# Altium PCB PCB4.PcbDoc
Units mil, origin at the board's own origin, x right, y up, seen from the top; angles counter-clockwise.
Board outline 3866.11 x 3866.11 mil, 2 copper layers (Top Layer, Bottom Layer); 78 components, 62 nets, 338 pads, 112 vias.
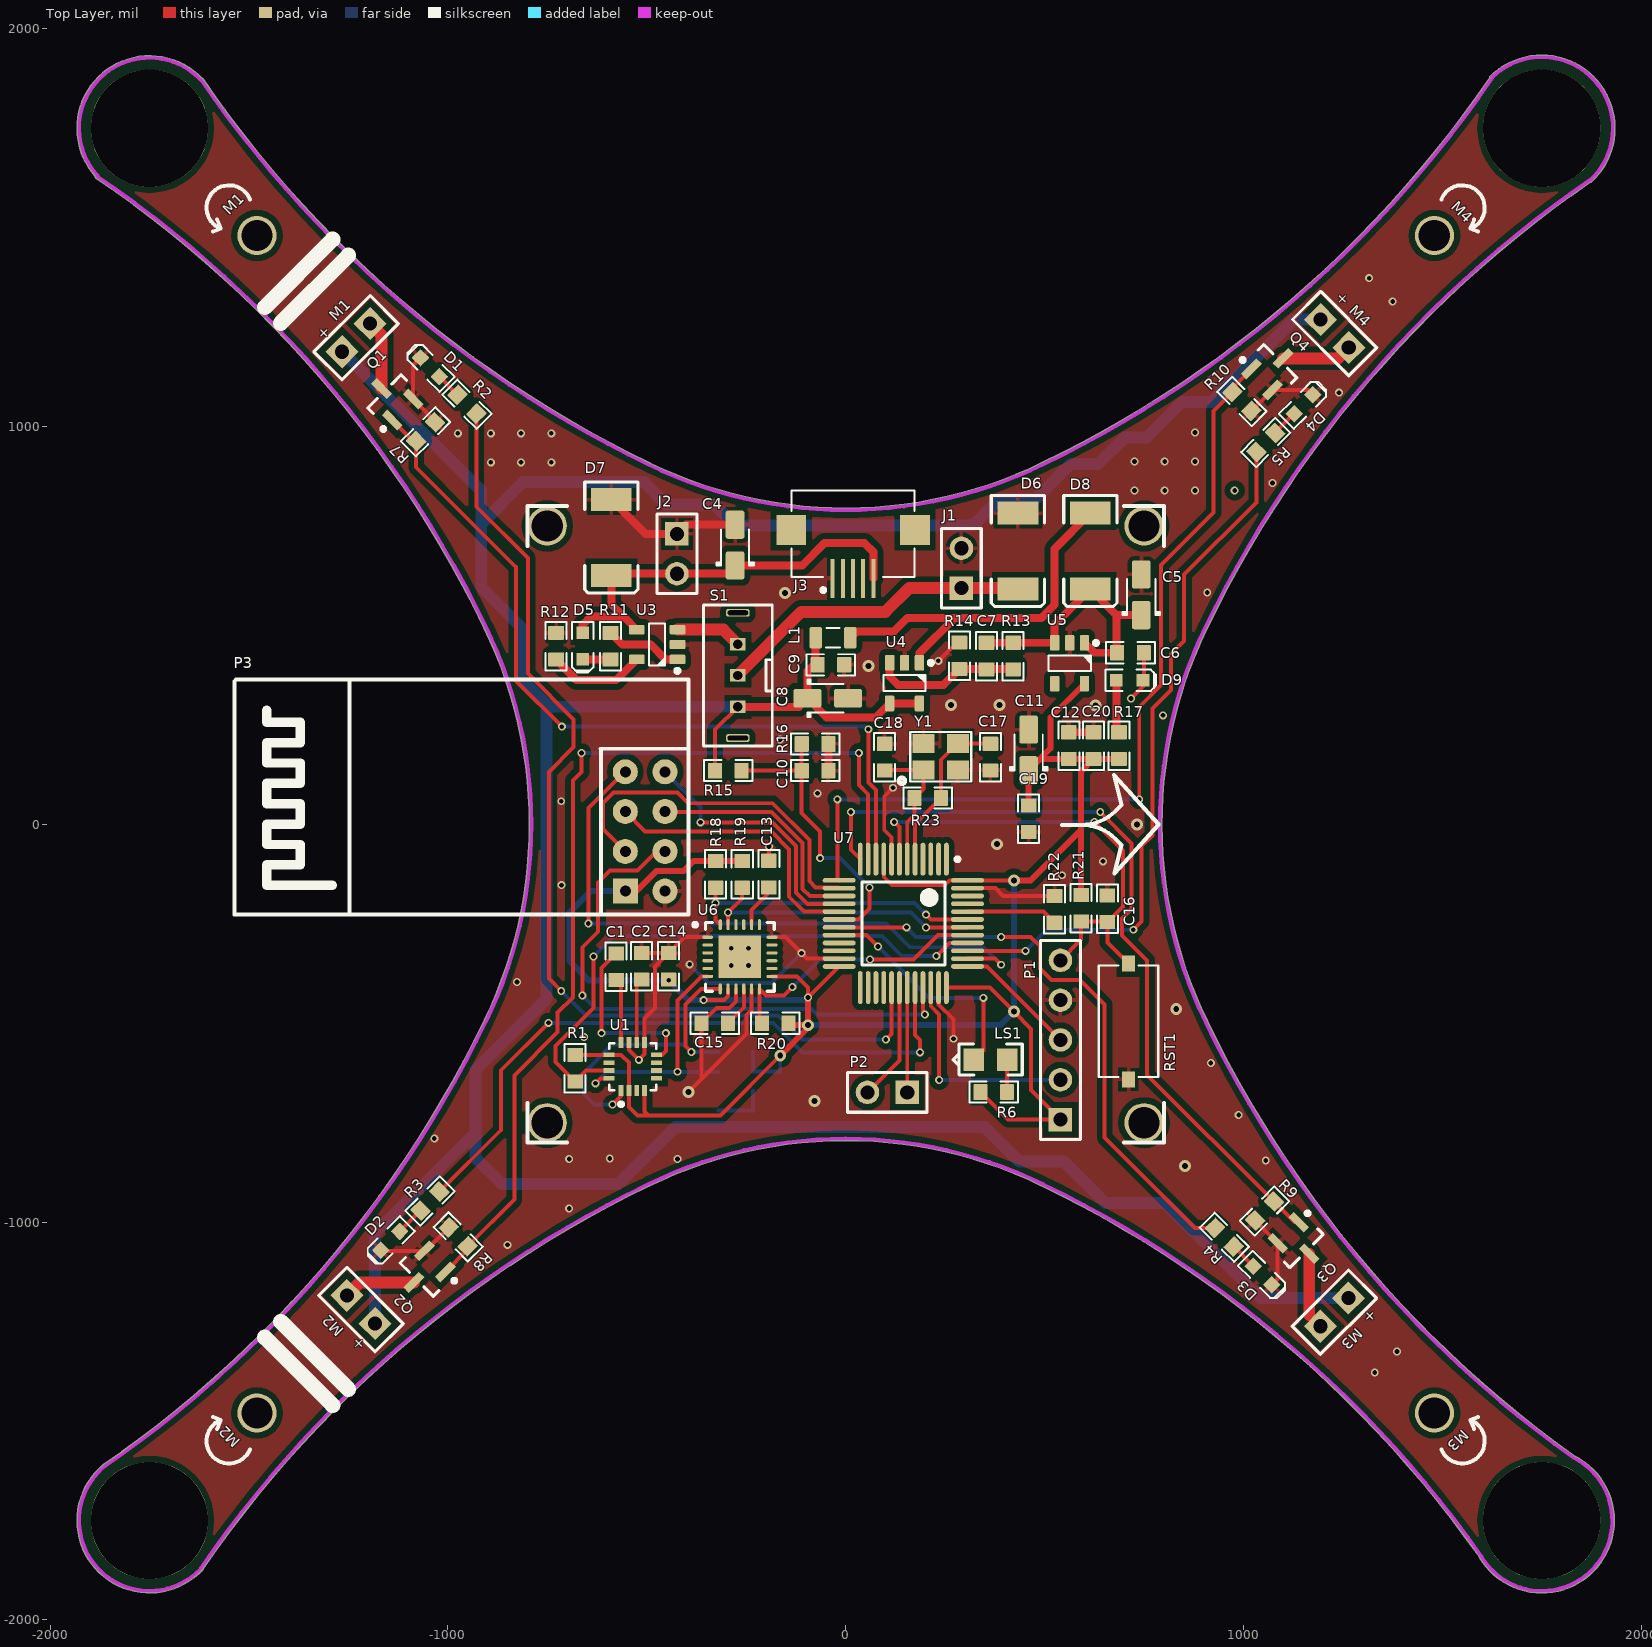
[diagram p0: Top Layer view]
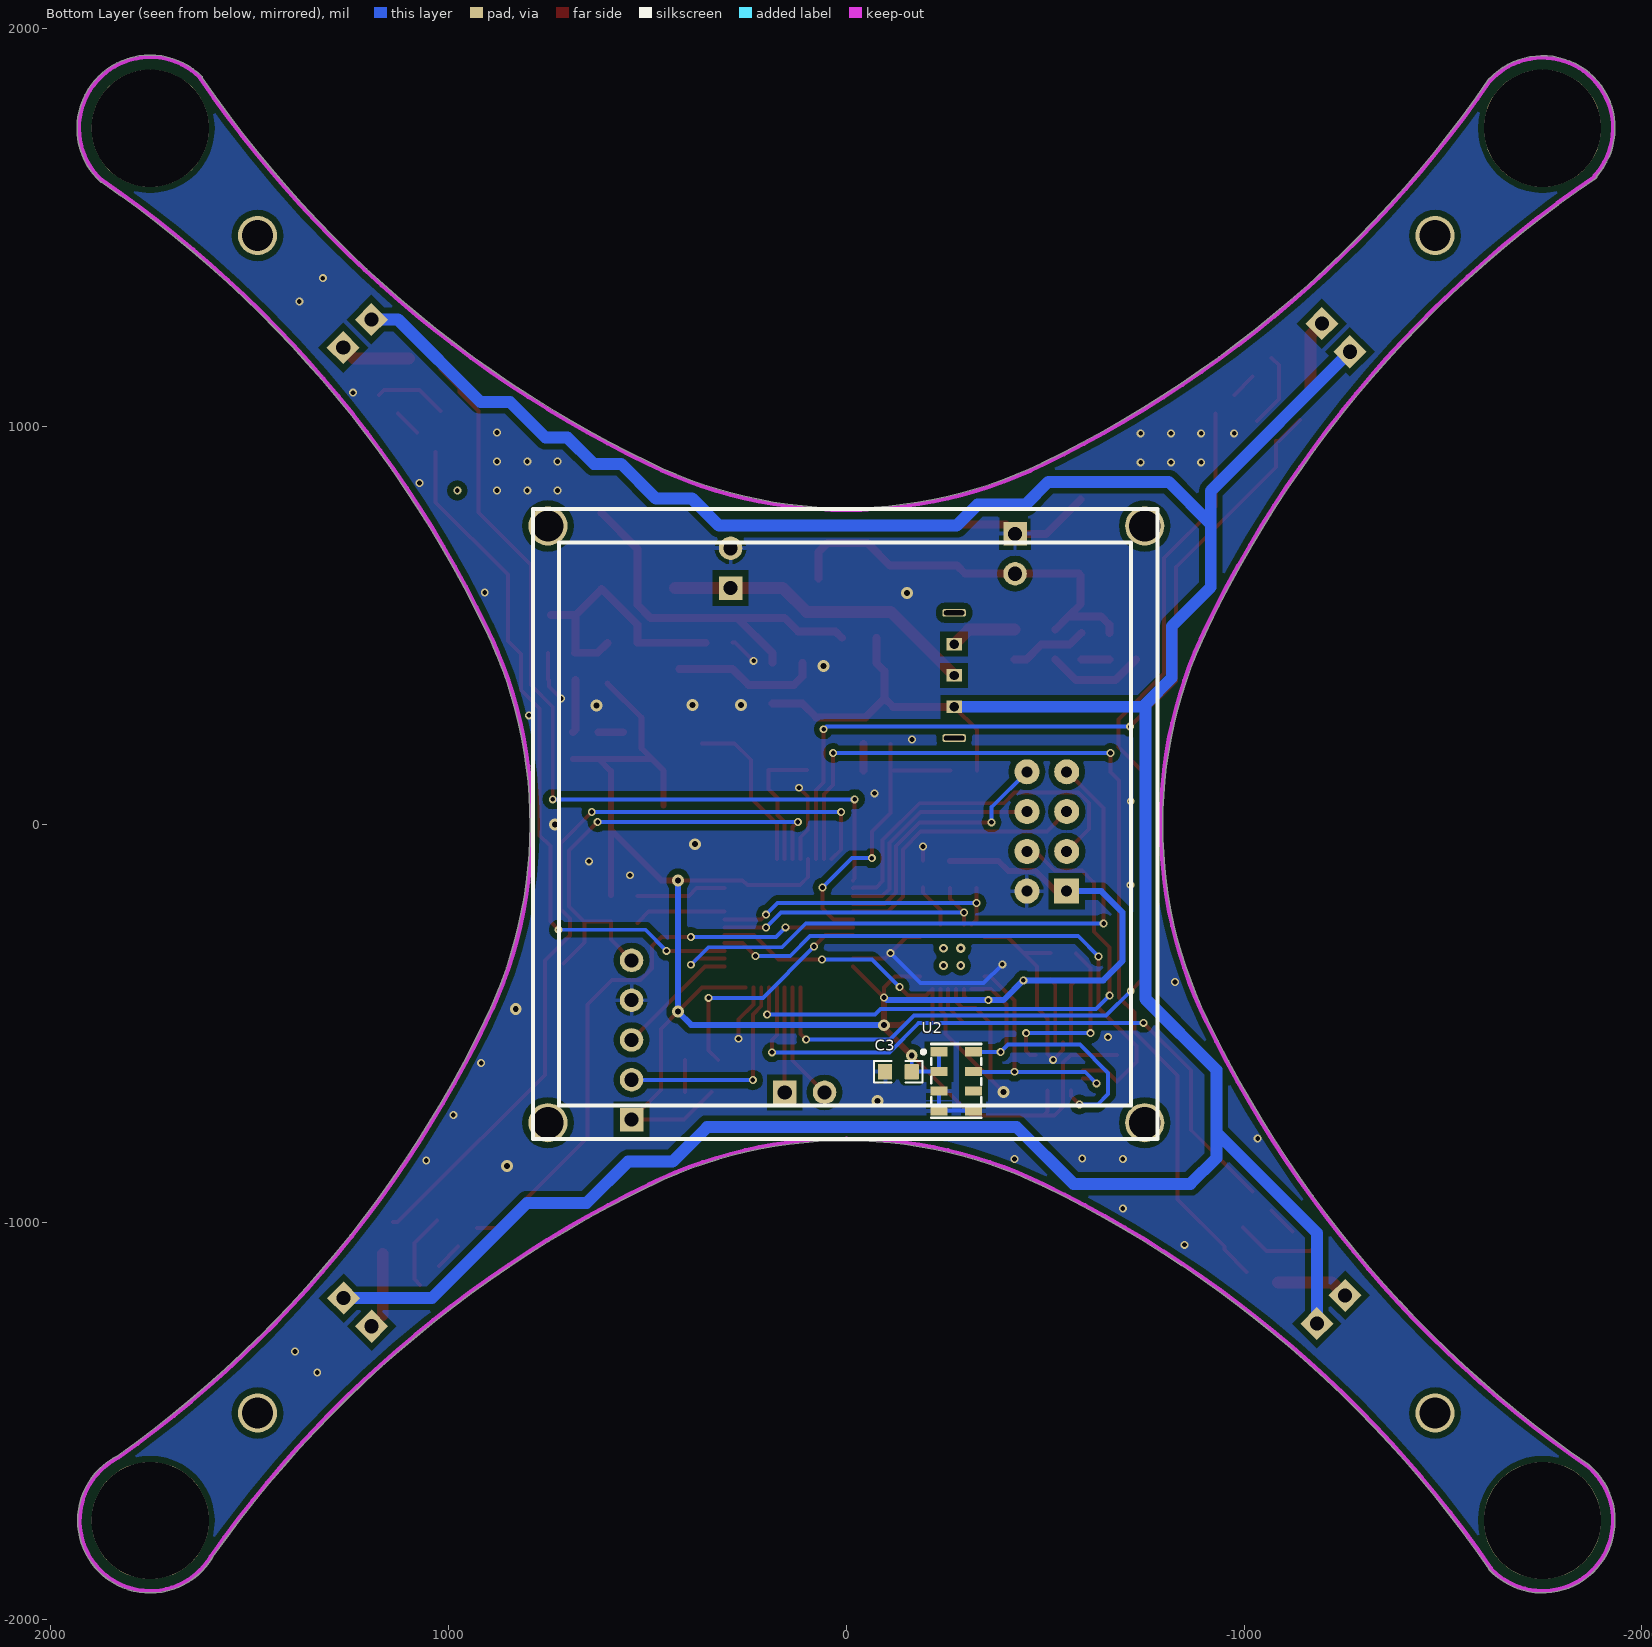
[diagram p1: Bottom Layer view, seen from below]

## Layer stack, top to bottom
Top Layer: signal copper 1.4
Dielectric: dielectric 12.6, FR-4, Dk 4.8
Bottom Layer: signal copper 1.4

## Board outline
-1867.7,-1610.9 ccw(c-1750,-1750) -1616.11,-1873.59 ccw(c-1619.79,-1870.19) -1614.8,-1870.64 cw(c756.29,-3500.97) -495.23,-909.88 ccw(c-497.38,-905.35) -495.17,-909.85 cw(c0,-1920) 491.53,-908.07 ccw(c494.92,-904.38) 492.74,-908.9 cw(c-758.75,-3500) 1593.12,-1842.06 ccw(c1598.05,-1841.17) 1593.75,-1843.75 ccw(c1750,-1750) 1932.22,-1750 ccw(c1750,-1750) 1831.49,-1587.02 ccw(c1829.25,-1591.51) 1830.41,-1586.63 cw(c3500.97,756.29) 909.88,-495.23 ccw(c905.35,-497.38) 909.85,-495.17 cw(c1920,0) 908.07,491.53 ccw(c904.38,494.92) 908.9,492.74 cw(c3500,-758.75) 1871.42,1613.54 ccw(c1871.33,1618.55) 1874.74,1614.87 ccw(c1750,1750) 1933.9,1750 ccw(c1750,1750) 1619.96,1880.04 ccw(c1623.51,1876.49) 1618.51,1876.05 cw(c-756.29,3500.97) 495.23,909.88 ccw(c497.38,905.35) 495.17,909.85 cw(c0,1920) -491.53,908.07 ccw(c-494.92,904.38) -492.74,908.9 cw(c758.75,3500) -1614.97,1873.5 ccw(c-1619.1,1870.66) -1617.93,1875.54 ccw(c-1750,1750) -1886.26,1629.02 ccw(c-1881.32,1628.17) -1884.14,1624.02 cw(c-3500.97,-756.29) -909.88,495.23 ccw(c-905.35,497.38) -909.85,495.17 cw(c-1920,0) -795.02,0 cw(c-1920,0) -908.07,-491.53 ccw(c-904.38,-494.92) -908.9,-492.74 cw(c-3500,758.75) -1866.46,-1610.13 ccw(c-1864.46,-1614.73)

## Design rules (kind name [scope] priority, off if disabled: settings)
Clearance Clearance_1 [InPolygon] p1: gap=15
Clearance [All] p2: gap=7
HoleSize [All] p1: absolutevalues=TRUE maxlimit=300 minlimit=1 maxpercent=80.000 minpercent=20.000
HoleToHoleClearance [All] p1 off: gap=10 allowstackedmicrovias=TRUE
MinimumSolderMaskSliver [All] p1 off: minsoldermaskwidth=10
PolygonConnect PolygonConnect_1 [InNet('GND') vs IsVia] p1: connectstyle=Direct reliefconductorwidth=10 reliefentries=4 polygonreliefangle="90 Angle" airgapwidth=10
PolygonConnect [All] p2: connectstyle=Relief reliefconductorwidth=10 reliefentries=4 polygonreliefangle="90 Angle" airgapwidth=10
RoutingVias [All] p1: holewidth=12 width=20 viastyle="Through Hole" minholewidth=12 minwidth=20 maxholewidth=28 maxwidth=50
SilkToSilkClearance [All] p1 off: silktosilkclearance=10
SilkToSolderMaskClearance [IsPad] p1 off: minsilkscreentomaskgap=10 clearancetoexposedcopper=TRUE
SolderMaskExpansion [All] p1: expansion=4
Width [All] p1: maxlimit=50 minlimit=8 preferedwidth=10
23 further rules are at their usual default settings.

## Classes and differential pairs
component class POWER: C4 C5 C6 C7 C8 C9 C10 C11 C12 D5 D6 D7 D8 D9 J1 J2 J3 L1 R11 R12 R13 R14 R15 R16 R17 S1 U3 U4 U5
component class HMC5883: C1 C2 R1 U1
component class JTAG: P1
component class "LED BELL": D1 D2 D3 D4 LS1 R2 R3 R4 R5 R6
component class MOTORS: M1 M2 M3 M4 Q1 Q2 Q3 Q4 R7 R8 R9 R10
component class MPU6050: C13 C14 C15 R18 R19 R20 U6
component class MS5611: C3 U2
component class NRF24L01: P3
component class STM32F103RC: C16 C17 C18 C19 C20 R21 R22 R23 RST1 U7 Y1
component class UART: P2

## Components (designator, comment, footprint, x,y, rotation, side; value= is the part's Value field where it differs from the comment)
C1 "Cap" CAP_0603 -577,-358 r90 top
C2 "Cap" CAP_0603 -513,-357 r270 top
C3 "Cap" CAP_0603 -131,-622 r180 bottom
C4 "106C" CAP_TAN_A1206 -278,702 r90 top
C5 "106C" CAP_TAN_A1206 743,577 r90 top
C6 "Cap" CAP_0603 716,431.31 r180 top
C7 "Cap" CAP_0603 354,423 r90 top
C8 "106C" CAP_TAN_A1206 -45,317 r0 top
C9 "Cap" CAP_0603 -37,401 r180 top
C10 "Cap" CAP_0603 -77,135 r180 top
C11 "106C" CAP_TAN_A1206 460,187 r90 top
C12 "Cap" CAP_0603 561,198 r270 top
C13 "Cap" CAP_0603 -193,-125 r90 top
C14 "Cap" CAP_0603 -445,-357 r90 top
C15 "Cap" CAP_0603 -329,-500 r0 top
C16 "Cap" CAP_0603 658,-212 r90 top
C17 "Cap" CAP_0603 364,169 r90 top
C18 "Cap" CAP_0603 98,169 r270 top
C19 "Cap" CAP_0603 460,14 r270 top
C20 "Cap" CAP_0603 623,198 r90 top
D1 "LED0" LED_0603_BLUE -1045,1149 r135 top
D2 "LED0" LED_0603_BLUE -1145,-1047 r225 top
D3 "LED0" LED_0603_GREEN 1048,-1134 r315 top
D4 "LED0" LED_0603_GREEN 1151,1056 r45 top
D5 "LED0" LED_0603_RED -661,448 r270 top
D6 "Diode 1N914" SS14 433,687 r270 top
D7 "Diode 1N914" SS14 -589,721 r270 top
D8 "Diode 1N914" SS14 615,687 r270 top
D9 "LED0" LED_0603_RED 714,362.31 r0 top
J1 "Header 2" HDR1X2 291,594 r90 top
J2 "Header 2" HDR1X2 -424,730 r270 top
J3 "USB Micro Type B" USB_MICRO_B 2,878 r90 top
L1 "Inductor" IND_0805 -32,469 r0 top
LS1 "Bell" LED0805 406,-592 r180 top
M1 "Motor" HDR1X2_180_2.54 -1266,1188 r45 top
M2 "Motor" HDR1X2_180_2.54 -1183,-1255 r135 top
M3 "Motor" HDR1X2_180_2.54 1264,-1191 r225 top
M4 "Motor" HDR1X2_180_2.54 1194,1269 r315 top
P1 "Header 5" HDR1X5 540,-742 r90 top
P2 "Header 2" HDR1X2 154.84,-673.84 r180 top
P3 "Header 4X2" "NRF24L01 MODULE" -454,-168 r0 top
Q1 "SI2302" SOT23 -1140,1069 r135 top
Q2 "SI2302" SOT23 -1059,-1125 r225 top
Q3 "SI2302" SOT23 1139,-1053 r315 top
Q4 "SI2302" SOT23 1073,1145 r45 top
R1 "Res1" RES_0603 -680,-613 r270 top
R2 "Res1" RES_0603 -952,1056 r315 top
R3 "Res1" RES_0603 -1045,-947 r45 top
R4 "Res1" RES_0603 952,-1038 r135 top
R5 "Res1" RES_0603 1056,960 r225 top
R6 "Res1" RES_0603 372,-673 r180 top
R7 "Res1" RES_0603 -1056,987 r225 top
R8 "Res1" RES_0603 -974,-1037 r315 top
R9 "Res1" RES_0603 1053,-972 r45 top
R10 "Res1" RES_0603 996,1063 r135 top
R11 "Res Semi" RES_0603 -591,448 r270 top
R12 "Res Semi" RES_0603 -728,448 r90 top
R13 "Res Semi" RES_0603 421,423 r90 top
R14 "Res Semi" RES_0603 286,424 r270 top
R15 "Res Semi" RES_0603 -295,135 r180 top
R16 "Res Semi" RES_0603 -77,202 r180 top
R17 "Res Semi" RES_0603 687,198 r270 top
R18 "Res1" RES_0603 -327,-126 r270 top
R19 "Res1" RES_0603 -260,-126 r270 top
R20 "Res1" RES_0603 -177,-500 r180 top
R21 "Res1" RES_0603 592,-211 r90 top
R22 "Res1" RES_0603 525,-214 r270 top
R23 "Res1" RES_0603 206,66 r0 top
RST1 "SW-PB" KEY 711,-350 r270 top
S1 "SW-SPDT" SW_SPDT1X3_180_xx -271,453 r270 top
U1 "HMC5883" HMC5883 -535,-609 r90 top
U2 "MS5611" MS5611 -233,-572 r180 bottom
U3 "LTC4054" SOT23-5 -474,452 r180 top
U4 "LM27313" SOT23-5 148,355 r270 top
U5 "MIC5205-3.3" SOT23-5 563,405 r270 top
U6 "MPU6050" MPU60X0_QFN24 -266,-333 r0 top
U7 "STM32F103C8T6" TQFP_48 145,-249 r270 top
Y1 "OSCILLATOR" 3225 239,170 r0 top

## Footprints (in the part's own frame and the unit in brackets; to place one, negate y for a bottom-side part, rotate by r counter-clockwise, add the part's x,y. Pads: shape width x height; smd on the part's side, far side on the other; paste and mask are expansions set on the pad)
3225 [mm]
  rect 1.4x1.2 smd: 1(-1.1,-0.85) 2(1.1,-0.85) 3(1.1,0.85) 4(-1.1,0.85)
  silkscreen extent -2.66,-1.72 1.95,1.58, body extent -1.33,-1.05 1.27,1.05, height 0.55
CAP_0603 [mm] "Chip Capacitor, Body 1.6x0.8mm, 0603, IPC Medium Density"
  round 0.254 on Mech14: 0(0,0)
  rrect10% 0.9x1 smd: 1(-0.85,0) 2(0.85,0)
  Top Layer pour cut-out: -0.5,0.5 0.5,0.5 0.5,-0.5 -0.5,-0.5
  silkscreen extent -1.55,-0.67 1.55,0.67, body extent -0.85,-0.45 0.85,0.45, height 0.89
CAP_TAN_A1206 [mm] "Capacitor, polarized, Molded Body, EIA 535BAAC size A; 3.20mm L X 1.60mm W X 1.80mm H"
  round 0.508 on Mech14: 0(0,0)
  rrect25% 1.8x1.2 smd: 1(-1.3,0) 2(1.3,0)
  silkscreen extent -1.3,-1.2 1,1.2, body extent -1.6,-0.8 1.6,0.8, height 1.8
HDR1X2 [mm] "Connector; Header; 2 Position"
  rect 1.5x1.5 hole 0.9: 1(0,0)
  round 1.5 hole 0.9: 2(2.54,0)
  silkscreen extent -1.27,-1.27 3.81,1.27
HDR1X2_180_2.54 [mm] "Connector; Header; 2 Position"
  rect 1.5x1.5 hole 0.9: 1(0,0) 2(2.54,0)
  silkscreen extent -1.27,-1.27 3.81,1.27, body extent -1.27,-1.27 3.81,1.27, height 7.58
HDR1X5 [mm] "Connector; Header; 5 Position"
  rect 1.5x1.5 hole 0.9: 1(0,0)
  round 1.5 hole 0.9: 2(2.54,0) 3(5.08,0) 4(7.62,0) 5(10.16,0)
  silkscreen extent -1.27,-1.27 11.43,1.27
HMC5883 [mm]
  rect 0.7x0.3 smd: 1(-1.525,0.75) 2(-1.525,0.25) 3(-1.525,-0.25) 4(-1.525,-0.75) 9(1.525,-0.75) 10(1.525,-0.25) 11(1.525,0.25) 12(1.525,0.75)
  rect 0.3x0.7 smd: 5(-0.75,-1.525) 6(-0.25,-1.525) 7(0.25,-1.525) 8(0.75,-1.525) 13(0.75,1.525) 14(0.25,1.525) 15(-0.25,1.525) 16(-0.75,1.525)
  silkscreen extent -2.52,-1.5 1.5,1.5, body extent -1.5,-1.5 1.5,1.5, height 0.8
IND_0805 [mm] "Ferrite Bead Chip, Body 2.0x1.2mm, 0805, IPC Medium Density"
  round 0.508 on Mech14: 0(0,0)
  rrect25% 0.8x1.35 smd: 1(-1.1,0) 2(1.1,0)
  silkscreen extent -0.43,-0.64 0.46,0.64, body extent -1,-0.62 1,0.63, height 0.9
KEY [mm]
  rect 1x0.8 smd: 1(0,0) 2(7.4,0)
  silkscreen extent 0.13,-1.91 7.24,1.91, body extent -0.32,-1.73 7.68,1.77, height 8.02
LED0805 [mil]
  rect 52x56 smd: 1(0,0) 2(84,0)
  silkscreen extent -38,-40 136,38
LED_0603_BLUE [mm] "Chip Capacitor, 2-Leads, Body 1.6x0.8mm, IPC Medium Density"
  round 0.254 on Mech14: 0(0,0)
  rrect10% 0.8x0.8 smd: 1(-0.85,0) 2(0.85,0)
  Top Layer pour cut-out: -0.5,0.5 0.5,0.5 0.5,-0.5 -0.5,-0.5
  silkscreen extent -1.55,-0.68 1.68,0.68, body extent -0.8,-0.4 0.8,0.4, height 0.75
LED_0603_GREEN [mm] "Chip Capacitor, 2-Leads, Body 1.6x0.8mm, IPC Medium Density"
  rect 0.8x0.8 smd: 1(-0.85,0) 2(0.85,0)
  Top Layer pour cut-out: -0.5,0.5 0.5,0.5 0.5,-0.5 -0.5,-0.5
  silkscreen extent -1.55,-0.68 1.68,0.68, body extent -0.8,-0.4 0.8,0.4, height 0.75
LED_0603_RED [mm] "Chip Capacitor, 2-Leads, Body 1.6x0.8mm, IPC Medium Density"
  rect 0.8x0.8 smd: 1(-0.85,0) 2(0.85,0)
  Top Layer pour cut-out: -0.5,0.5 0.5,0.5 0.5,-0.5 -0.5,-0.5
  silkscreen extent -1.55,-0.67 1.68,0.67, body extent -0.8,-0.4 0.8,0.4, height 0.75
MPU60X0_QFN24 [mm] "QFN, 24-Leads, Body 4.00x4.00mm, Pitch 0.50mm, Thermal Pad 2.70x2.70mm, IPC Medium Density"
  oval 0.7x0.2 smd: 1(-2.05,1.25) 2(-2.05,0.75) 3(-2.05,0.25) 4(-2.05,-0.25) 5(-2.05,-0.75) 6(-2.05,-1.25) 13(2.05,-1.25) 14(2.05,-0.75) 15(2.05,-0.25) 16(2.05,0.25) 17(2.05,0.75) 18(2.05,1.25)
  oval 0.2x0.7 smd: 7(-1.25,-2.05) 8(-0.75,-2.05) 9(-0.25,-2.05) 10(0.25,-2.05) 11(0.75,-2.05) 12(1.25,-2.05) 19(1.25,2.05) 20(0.75,2.05) 21(0.25,2.05) 22(-0.25,2.05) 23(-0.75,2.05) 24(-1.25,2.05)
  rect 2.7x2.7 smd: 25(0,0)
  silkscreen extent -2.97,-2.2 2.2,2.2, body extent -2.05,-2.05 2.05,2.05, height 0.9
MS5611 [mm]
  rect 1.1x0.6 smd: 1(0,0) 2(0,-1.25) 3(0,-2.5) 4(0,-3.75) 5(2.2,-3.75) 6(2.2,-2.5) 7(2.2,-1.25) 8(2.2,0)
  silkscreen extent -1.1,-4.2 2.7,0.5
"NRF24L01 MODULE" [mm] "NRF24L01_MODE"
  round 1.6 hole 0.7: 1(0,0) 3(0,2.54) 4(-2.54,2.54) 5(0,5.08) 6(-2.54,5.08) 7(0,7.62) 8(-2.54,7.62)
  rect 1.6x1.6 hole 0.7: 2(-2.54,0)
  silkscreen extent -27.5,-1.5 1.5,13.5
RES_0603 [mm]
  round 0.254 on Mech14: 0(0,0)
  rrect10% 0.9x1 smd: 1(-0.85,0) 2(0.85,0)
  Top Layer pour cut-out: -0.5,0.5 0.5,0.5 0.5,-0.5 -0.5,-0.5
  silkscreen extent -1.55,-0.67 1.55,0.67, body extent -0.87,-0.47 0.88,0.48, height 0.54
SOT23 [mm] "SOT23, 3-Leads, Body 3.0x2.5mm (max), Pitch 0.95mm, IPC Medium Density"
  rect 1.4x0.5 smd: 1(-0.95,0.95) 2(-0.95,-0.95) 3(0.95,0)
  silkscreen extent -1.07,-1.5 0.7,1.87, body extent -1.4,-1.45 1.4,1.45, height 1.29
SOT23-5 [mm]
  round 0.5 on Mech14: 0(0,0)
  rrect25% 1x0.6 smd: 1(-1.3,0.95) 2(-1.3,0) 3(-1.3,-0.95) 4(1.3,-0.95) 5(1.3,0.95)
  silkscreen extent -1.42,-1.35 0.51,1.81, body extent -1.4,-1.45 1.4,1.45, height 1.44
SS14 [mm] "SS14,M7,TVS"
  rect 1.45x2.6 smd: 1(-2.425,0) 2(2.425,0)
  silkscreen extent -3.55,-1.7 3.55,1.7, body extent -2.8,-1.97 2.8,1.98, height 2.62
SW_SPDT1X3_180_xx [mm] "TE Connectivity SLS121PC04 SPDT slider"
  rect 0.8x1 hole 0.6: 1(0,0) 2(2,0) 3(4,0)
  rrect50% 0.5x1.5 hole 0.3 slot 1.3 at 90 deg: ""(-2,0) ""(6,0)
  silkscreen extent -2.5,-2.2 6.5,2.2, body extent -2.3,-2.15 6.3,2.15, height 8
TQFP_48 [mm] "Thin QFP, 48-Leads, Body 7x7mm, Pitch 0.5mm, IPC Low Density"
  oval 2.1x0.3 smd: 1(-4.1,2.75) 2(-4.1,2.25) 3(-4.1,1.75) 4(-4.1,1.25) 5(-4.1,0.75) 6(-4.1,0.25) 7(-4.1,-0.25) 8(-4.1,-0.75) 9(-4.1,-1.25) 10(-4.1,-1.75) 11(-4.1,-2.25) 12(-4.1,-2.75) 25(4.1,-2.75) 26(4.1,-2.25) 27(4.1,-1.75) 28(4.1,-1.25) 29(4.1,-0.75) 30(4.1,-0.25) 31(4.1,0.25) 32(4.1,0.75) 33(4.1,1.25) 34(4.1,1.75) 35(4.1,2.25) 36(4.1,2.75)
  oval 0.3x2.1 smd: 13(-2.75,-4.1) 14(-2.25,-4.1) 15(-1.75,-4.1) 16(-1.25,-4.1) 17(-0.75,-4.1) 18(-0.25,-4.1) 19(0.25,-4.1) 20(0.75,-4.1) 21(1.25,-4.1) 22(1.75,-4.1) 23(2.25,-4.1) 24(2.75,-4.1) 37(2.75,4.1) 38(2.25,4.1) 39(1.75,4.1) 40(1.25,4.1) 41(0.75,4.1) 42(0.25,4.1) 43(-0.25,4.1) 44(-0.75,4.1) 45(-1.25,4.1) 46(-1.75,4.1) 47(-2.25,4.1) 48(-2.75,4.1)
  silkscreen extent -4.22,-2.65 2.65,3.57, body extent -4.5,-4.5 4.5,4.5, height 1.2
USB_MICRO_B [mm] "Connector; USB2.0, Type A, SM; 5 Position; Right Angle"
  rect 2.5x0.25 smd: 1(-6.6,-1.719) 2(-6.6,-1.069) 3(-6.6,-0.419) 4(-6.6,0.231) 5(-6.6,0.881)
  rect 1.9x1.9 smd: ""(-3.505,-4.369) ""(-3.505,3.531)
  silkscreen extent -7.47,-4.36 -1,3.52, body extent -6.36,-4.42 -0.93,3.56, height 2.71

## Part data
C1 C2 C3 C6 C7 C9 C10 C12 C13 C14 C15 C16 C17 C18 C19 C20: "Capacitor"
C4 C5 C8 C11: library part "Cap Pol2", "Polarized Capacitor (Axial)"
D1 D2 D3 D4 D5 D9: "Typical INFRARED GaAs LED"
D6 D7 D8: "High Conductance Fast Diode"
J1 J2 P2: "Header, 2-Pin"
J3: library part USB_Micro_TypeB, "Connector SMD USB Micro Type B middle mount"
LS1: "Electrical Bell"
P1: "Header, 5-Pin"
P3: "Header, 4-Pin, Dual row"
Q1 Q2 Q3 Q4: "N-Channel MOSFET"
R1 R2 R3 R4 R5 R6 R7 R8 R9 R10 R18 R19 R20 R21 R22 R23: "Resistor"
R11 R12 R13 R14 R15 R16 R17: "Semiconductor Resistor"
RST1: "Switch"
S1: "SPDT Subminiature Toggle Switch, Right Angle Mounting, Vertical Actuation"

## Free pads (board coordinates)
  round 295.28 hole 295.28: ""(-1750,-1750) ""(-1750,1750) ""(1750,-1750) ""(1750,1750)
  round 98.43 hole 78.74: ""(-1480,-1480) ""(-1480,1480) ""(-750,-750) ""(-750,750) ""(750,-750) ""(750,750) ""(1480,-1480) ""(1480,1480)

## Via types
v1: diameter 20, hole 12, Top Layer to Bottom Layer, 93 vias
v2: diameter 30, hole 15, Top Layer to Bottom Layer, 15 vias
v3: diameter 22, hole 12, Top Layer to Bottom Layer, 3 vias
v4: diameter 23.62, hole 11.81, Top Layer to Bottom Layer, 1 vias

## Nets (pads, with @x,y where several pads share a name; then routed paths per layer and width w, separated by ;. In a path a pad name is that pad's centre, name@x,y a point inside that pad or via, vN(x,y) a via of type N, cw(c..) or ccw(c..) an arc to the next point about the centre after c; other vN are vias at no path point)
3V3: C3.2 C11.1 C12.2 C14.1 C19.1 C20.1 P1.1 P3.2 R1.1 R6.2 R17.2 R18.1 R19.1 R20.1 R21.2 U1.2 U1.4 U1.13 U2.1 U2.2 U5.5 U6.8 U6.13 U7.9 U7.24 U7.36 U7.48 | length 5850.3
  Top Layer w10: R1.1@-679.94,-579.47 U1.13 -564.53,-579.47 -544.84,-599.16 U1.2 -544.84,-710.16 -523,-732 -495,-732 ; U1.4 -505.47,-721.53 -495,-732 ; v1(-357,-442) -305.53,-442 -295.53,-432 U6.8 ; U6.13 -122.79,-382.21 -95,-410 v1(-95,-435) ; v2(-164.46,-581.54) -314.93,-732 -495,-732 ; v1@-95,-435.85 U7.24 ; U7.9 95.79,-131.79 117,-153 248.61,-153 260.87,-140.73 U7.48 v2(423,-140.73) ; U7.36 362.42,-410.42 v2(423,-471) 466,-514 466,-668 P1.1 407.54,-742 R6.2
  Top Layer w15: P3.2 -526,-168 -475,-117 -407,-117 -382.54,-92.54 R18.1 R19.1 ; v2(-164.46,-581.54) -95,-512.07 v2(-95,-505) ; R20.1 -138.54,-505 v2(-95,-505) ; v1@-95,-435.85 v2(-95,-505) ; v2(423,-140.73) 465.27,-140.73 592,-14 ; C19.1 C11.1 515,190.82 515,268.42 U5.5 ; 489.65,164.54 C12.2 C20.1 ; R21.2 592,-14 ; R17.2 C20.1 ; 592,-14 592,133.54 C20.1
  Bottom Layer w10: U2.1 U2.2 C3.2@-165.25,-621.21 ; C3.2 v2(-164.46,-581.54)
  Bottom Layer w15: P3.2 -641,-168 -694,-221 -694,-344 -646,-392 v1(-445,-392) -395,-442 v1(-357,-442) v1@-102,-442 ; v2@-95,-504 390,-504 v2(423,-471) v2(423,-140.73)
3V7: C8.1 C9.2 L1.1 M1.1 M2.1 M3.1 M4.1 R15.2 S1.3 U4.4 U4.5 | length 9090.8
  Top Layer w10: R15.2 -328.46,238.06 S1.3
  Top Layer w20: S1.3 -117.66,295.52 C8.1 ; L1.1 -75.31,405.84 -96.18,384.97 C8.1 ; U4.5 U4.4 75.78,269 -48.18,269 C8.1
  Bottom Layer w30: M1.1 -916,838 -916,755 ; M2.1 -1183,-1027 -930,-774 ; -745.52,295.52 S1.3 ; M4.1 1127,1269 920,1062 846,1062 756,972 701,972 635,906 566,906 479,819 388,819 320,751 -277,751 -330,804 -451,804 -508,861 -810,861 -916,755 ; M3.1 1042,-1191 802.61,-951.61 652.61,-951.61 548.54,-847.54 436.54,-847.54 350,-761 -428,-761 -571,-904 -865,-904 -930,-839 -930,-774 ; -930,-774 -930,-617 -752,-439 -752,302 -818,368 -818,498 -916,596 -916,755
5V: C5.1 C6.2 C7.2 D8.2 R13.2 U5.1 U5.3 | length 683.9
  Top Layer w20: C7.2 R13.2 525.31,456.46 525.31,501.84 D8.2 680.71,525.82 ; U5.1 625.27,431.31 C6.2 ; C6.2@680.71,433.14 680.71,525.82 ; C5.1 680.71,525.82
AUX_I2C.SCL: U1.1 U2.8 U6.7 | length 784.2
  Top Layer w10: v1(-586,-704) -564.53,-682.53 U1.1 ; v1(-388,-572) -403,-557 -403,-453 -363.71,-413.71 U6.7
  Bottom Layer w10: v1(-586,-704) -632,-704 -658,-678 -658,-625 -587,-554 -406,-554 v1(-388,-572) U2.8
AUX_I2C.SDA: U1.16 U2.7 U6.6 | length 640.2
  Top Layer w10: v1(-629,-651) -616.53,-638.53 U1.16 ; v1(-423,-622) -423,-443 -362.21,-382.21 U6.6
  Bottom Layer w10: v1(-629,-651) -600,-622 v1(-423,-622) U2.7@-320.4,-622
BAT_CHECK: C10.2 R15.1 R16.2 U7.18 | length 752
  Top Layer w10: R15.1 C10.2 ; R16.2 C10.2 ; v1(-64,-85) -64,-18 -110.46,28.46 C10.2 ; U7.18 31.84,-239.16 60,-211 v1(60,-159)
  Bottom Layer w10: v1(-64,-85) -14,-85 v1(60,-159)
CHARGE_5V: C4.1 D5.1 D7.2 J2.2 J3.1 U3.4 | length 1062
  Top Layer w20: D5.1 -661,502 -640,523 -558.78,523 ; U3.4 -558.78,523 ; J3.1 69.67,684.33 47,707 -53,707 -109.18,650.82 C4.1 -298.82,630 J2.2 -584.53,630 D7.2 -589,553.22 -558.78,523
GND: C2.1 C3.1 C4.2 C5.2 C6.1 C8.2 C9.1 C10.1 C11.2 C12.1 C13.2 C14.2 C15.1 C16.2 C17.1 C18.1 C19.2 C20.2 D1.2 D2.2 D3.2 D4.2 D6.1 D7.1 D9.2 J1.2 J2.1 J3.5 P1.4 P3.1 Q1.2 Q2.2 Q3.2 Q4.2 R7.1 R8.1 R9.1 R10.1 R12.2 R14.1 R16.1 R22.1 RST1.2 U1.9 U1.11 U2.3 U2.4 U2.5 U3.2 U4.2 U5.2 U6.1 U6.9 U6.11 U6.18 U7.8 U7.23 U7.35 U7.47 Y1.2 Y1.4 | length 3844.7
  Top Layer w10: D2.2 -1167.22,-1072.11 Q2.2 -1056.43,-1072.11 R8.1 ; D1.2 -1087.11,1154.22 Q1.2 R7.1@-1032.34,1014.23 ; U1.11 -544.84,-567.16 v1(-520,-592) -505.47,-577.47 U1.9 -505.47,-488.47 -479,-462 -479,-357.54 C14.2 ; C2.1 C14.2 ; v2(-395,-673) -362.46,-640.46 ; U6.1 -405.25,-283.79 C14.2 ; U6.9 -275.84,-445.84 -292,-462 -324.46,-462 C15.1 -362.46,-640.46 ; U6.11 -236.47,-466.47 -249,-479 -249,-527 -362.46,-640.46 ; C13.2 v1(-193,-56) ; U6.18 -151.21,-283.79 v1(-111,-324) -97.42,-337.58 U7.23 ; U7.8 115.47,-32.47 97,-14 97,70 v1(119,92) ; v1(233,411) 279.46,457.46 R14.1 ; U7.35 233.58,-452.54 271,-489.96 v1(271,-539) ; U7.47 376.42,-160.42 396,-180 R22.1@524.46,-180 ; v1(717,316) 747.46,346.46 D9.2 ; D9.2@749.46,364.31 C6.1 ; R10.1 1020.23,1039.34 Q4.2 1162.22,1092.11 D4.2 ; R9.1 1029.34,-996.23 Q3.2 1086.11,-1143.22 D3.2
  Top Layer w20: D7.1 -502.53,730 J2.1 -400.82,753.18 C4.2 ; C10.1 R16.1 ; C12.1 C20.2
  Bottom Layer w10: v1(-392,-352) -345,-399 -186,-399 v1(-111,-324) ; U2.5 U2.4 U2.3
  other v1: 1330,-1378 1386,-1325 -850,-1057 -695,-966 1056,-845 -695,-841 -423,-841 -593,-840 -1034,-790 988,-731 918,-600 -658,-535 -826,-396 -714,-153 544,-128 647,-93 -715,58 -71,78 -165,213 798,274 909,583 726,839 802,839 878,839 1073,858 -892,910 -816,910 -740,910 726,912 802,912 878,912 -975,983 -892,983 -816,983 -740,983 878,985 1240,1085 1375,1314 1316,1373
  other v2: 853,-859 -78,-696 831,-464 380,-50 732,0 628,299 265,300 387,300 57,398 -153,582
GPIO_BELL: LS1.2 U7.20 | length 593.6
  Top Layer w10: U7.20 52.53,-278.53 v1(81,-307) ; LS1.2 346,-568 v1(346,-436)
  Bottom Layer w10: v1(81,-307) 210,-436 v1(346,-436)
GPIO_LED0: R2.2 U7.29 | length 2594.2
  Top Layer w10: R2.2 -928.34,798.34 -799,669 -799,379 -684,264 -684,194 -746,132 -746,-388 v1(-715,-419) ; v1(101,-541) 115.47,-526.53 U7.29
  Bottom Layer w10: v1(-715,-419) -653,-481 -170,-481 -110,-541 v1(101,-541)
GPIO_LED1: R3.2 U7.32 | length 1670.4
  Top Layer w10: R3.2 -867,-769 -867,-619 v1(-747,-499) ; U7.32 174.53,-529.53 187,-542 v1(187,-573)
  Bottom Layer w10: v1(-747,-499) -182,-499 -108,-573 v1(187,-573)
GPIO_LED2: R4.2 U7.19 | length 1484.1
  Top Layer w10: U7.19 v1(152.84,-258.84) ; v1(391,-283) 465,-283 488,-306 488,-362 517,-391 589,-391 651,-453 651,-787 878.34,-1014.34 R4.2
  Bottom Layer w10: v1(152.84,-258.84) 177,-283 v1@389,-283
GPIO_LED3: R5.2 U7.39 | length 1768
  Top Layer w10: U7.39 v1(452,-317.9) ; v1(723,-265) 744,-244 744,-54.61 771,-27.61 771,291 818,338 818,428 851,461 851,628 1032.34,809.34 R5.2
  Bottom Layer w10: v1(452,-317.9) 504.9,-265 v1(723,-265)
HMC5883_IRQ: R1.2 U1.15 U7.40 | length 1468.3
  Top Layer w10: v1@-634,-330 v1(-634,-332) -634,-462 -729,-557 -729,-597.46 R1.2 -652.38,-618.84 U1.15 ; v1(228,-331) 260.79,-298.21 U7.40
  Bottom Layer w10: v1(-634,-332) -583,-281 91,-281 141,-331 v1(228,-331)
I2C1.SCL: R19.2 U6.23 U7.42 | length 724.9
  Top Layer w10: U6.23 v1(-295.53,-221.53) -260,-186 R19.2 ; v1@202.16,-258.84 U7.42
  Bottom Layer w10: v1(-295.53,-221.53) 164.53,-221.53 v1(202,-259)
I2C1.SDA: R18.2 U6.24 U7.43 | length 748.2
  Top Layer w10: R18.2 v1(-327,-198) -327,-240.5 U6.24 ; v1(202,-227) 214.16,-239.16 U7.43
  Bottom Layer w10: v1(-327,-198) 173,-198 v1(202,-227)
MPU6050_IRQ: R20.2 U6.12 U7.41 | length 672.9
  Top Layer w10: R20.2@-216.79,-493.68 U6.12 -200.25,-430.25 -155.25,-430.25 v1(-134,-409) ; v1(61,-340) 171,-340 232.47,-278.53 U7.41
  Bottom Layer w10: v1(-134,-409) -65,-340 v1(61,-340)
NetC1_1: C1.1 U1.12 | length 162.7
  Top Layer w10: C1.1 -564.53,-403.94 U1.12
NetC1_2: C1.2 U1.8 | length 449.7
  Top Layer w10: v1(-614,-525) -614,-361.54 C1.2 ; U1.8 -461.47,-579.47 -452,-570 v1(-452,-525)
  Bottom Layer w10: v1(-614,-525) v1(-452,-525)
NetC2_2: C2.2 U1.10 | length 163.5
  Top Layer w10: U1.10 -525.16,-402.62 C2.2
NetC7_1: C7.1 R13.1 R14.2 U4.3 | length 369.8
  Top Layer w20: U4.3 110.6,371.4 132,350 245.46,350 R14.2 R13.1@420,390.54
NetC13_1: C13.1 U6.20 | length 111.8
  Top Layer w10: U6.20 -236.47,-215.47 -193,-172 C13.1
NetC15_2: C15.2 U6.10 | length 102.6
  Top Layer w10: C15.2 -256.16,-460.62 U6.10
NetD1_1: D1.1 R2.1 | length 64.6
  Top Layer w10: D1.1 R2.1
NetD2_1: D2.1 R3.1 | length 74.5
  Top Layer w10: D2.1 R3.1
NetD3_1: D3.1 R4.1 | length 68.8
  Top Layer w10: R4.1 D3.1
NetD4_1: D4.1 R5.1 | length 67.4
  Top Layer w10: R5.1@1079.66,984.66 D4.1
NetD5_2: D5.2 R11.2 | length 70
  Top Layer w20: D5.2 R11.2
NetD6_2: D6.2 J1.1 S1.2 | length 792.5
  Top Layer w30: S1.2 -111.26,534 100,534 160,594 J1.1 D6.2@430.53,594
NetD8_1: D8.1 L1.2 U4.1 | length 965.3
  Top Layer w20: L1.2 27.31,485 121,485 155,519 274,519 ; U4.1 185.4,430.4 274,519 ; D8.1 525,692.47 525,552 492,519 274,519
NetD9_1: D9.1 R17.1 | length 133.5
  Top Layer w20: D9.1 680.54,237.93 R17.1
NetLS1_1: LS1.1 R6.1 | length 80.5
  Top Layer w10: R6.1@406,-672.46 LS1.1
NetM1_2: M1.2 Q1.3 | length 175.2
  Top Layer w30: M1.2 -1166.45,1229.87 Q1.3
NetM2_2: M2.2 Q2.3 | length 181.9
  Top Layer w30: M2.2 -1220.87,-1151.45 Q2.3
NetM3_2: M3.2 Q3.3 | length 154.4
  Top Layer w30: 1165.45,-1233.87 Q3.3
NetM4_2: M4.2 Q4.3 | length 176.4
  Top Layer w30: Q4.3 1237.87,1171.45 M4.2
NetR11_1: R11.1 U3.1 | length 195.9
  Top Layer w20: R11.1 -561.54,452 -490,452 -452.6,414.6 U3.1
NetR12_1: R12.1 U3.5 | length 245.5
  Top Layer w20: R12.1 -676.46,363 -576.78,363 U3.5
NetR22_2: R22.2 U7.44 | length 230.2
  Top Layer w10: U7.44 497.01,-219.47 R22.2
NRF24L01_CE: P3.3 U7.33 | length 1451.3
  Top Layer w10: v1(-662,-430) -662,-309 -622,-269 -622,-146 -592,-116 -523,-116 -475,-68 P3.3 ; U7.33 194.21,-473.21 v1(199,-478)
  Bottom Layer w10: v1(-662,-430) -628,-464 -86,-464 -72,-478 v1(199,-478)
NRF24L01_CSN: P3.4 U7.14 | length 909.5
  Top Layer w10: P3.4 -610,-12 -610,54 -584,80 -423,80 -396,53 -183.92,53 -91,-39.92 -91,-143 -75.36,-158.64 -18.2,-158.64 U7.14
NRF24L01_IRQ: P3.8 U7.38 | length 1592.8
  Top Layer w10: v1(-647,-249) -647,41.04 -556.04,132 P3.8 ; U7.38 375.58,-337.58 v1(391,-353)
  Bottom Layer w10: v1(-647,-249) 102,-249 162,-309 347,-309 v1(391,-353)
OSC_IN: C17.2 R23.2 U7.5 Y1.3 | length 416.3
  Top Layer w10: U7.5 174.53,1.06 R23.2 ; R23.2@240,66.54 240,162.38 281.08,203.46 Y1.3 C17.2@363,203.46
OSC_OUT: C18.2 R23.1 U7.6 Y1.1 | length 337.7
  Top Layer w10: C18.2@99,136.54 Y1.1 195.69,89.15 R23.1 172.54,23.54 154.84,5.84 U7.6
PWM.M1: Q1.1 R7.2 U7.10 | length 2058.4
  Top Layer w10: Q1.1 -1087.23,963.34 R7.2 -1079.66,897.66 -828.3,646.3 -828.3,360.3 v1(-713.5,245.5) ; v1@57,238 57,105 76.1,85.9 U7.10
  Bottom Layer w10: v1(-713.5,245.5) 50.5,245.5 v1(57,239)
PWM.M2: Q2.1 R8.2 U7.11 | length 2419
  Top Layer w10: Q2.1 -950.34,-1069.23 R8.2 -833,-943.33 -833,-631 -724,-522 -724,-473 -686,-435 -686,110 -664,132 v1(-664,179) ; v1(33,179) 33,99 56.42,75.58 U7.11
  Bottom Layer w10: v1(-664,179) v1(33,179)
PWM.M3: Q3.1 R9.2 U7.12 | length 2019.3
  Top Layer w10: v1(13,31) 13,-63.85 U7.12 ; v1(640,31) 719,-48 719,-213 695,-237 695,-279 758,-342 758,-629.67 R9.2 1128.43,-1000.11 Q3.1
  Bottom Layer w10: v1(13,31) v1(640,31)
PWM.M4: Q4.1 R10.2 U7.13 | length 2163.5
  Top Layer w10: v1(-21,63) -21,-136.15 U7.13 ; v1(738,63) 738,295 793,350 793,652 925,784 925,1039.33 R10.2 972.34,1097.23 Q4.1
  Bottom Layer w10: v1(-21,63) v1(738,63)
RESET: C16.1 P1.5 R21.1 RST1.1 U7.7 | length 1210
  Top Layer w10: v1(122,6) 135.16,-7.16 U7.7 ; P1.5 592,-290 R21.1 C16.1@657,-244.46 ; v1(625,6) 697,-66 697,-206.46 C16.1 658,-297 RST1.1
  Bottom Layer w10: v1(122,6) v1(625,6)
SPI1.MISO: P3.7 U7.16 | length 665.8
  Top Layer w10: v1(-365,5) -184,5 -125,-54 -125,-171 -96.21,-199.79 U7.16
  Bottom Layer w10: P3.7 -365,43 v1(-365,5)
SPI1.MOSI: P3.6 U7.17 | length 711.5
  Top Layer w10: P3.6 -504,-18 -187,-18 -142,-63 -142,-182 -104.53,-219.47 U7.17
SPI1.SCLK: P3.5 U7.15 | length 592.4
  Top Layer w10: P3.5@-454,31 -185.96,31 -108,-46.96 -108,-162 -89.9,-180.1 U7.15
SPI2.MISO: U7.27
SPI2.MOSI: U7.28
SPI2.SCLK: U7.26
SWCLK: P1.3 U7.37 | length 310.1
  Top Layer w10: U7.37 355.27,-357.27 P1.3
SWDIO: P1.2 U7.34 | length 545.3
  Top Layer w10: U7.34 213.9,-456.9 235,-478 v1(235,-643)
  Bottom Layer w10: v1(235,-643) P1.2@539,-643
UART1_RX: P2.1 U7.31 | length 263.4
  Top Layer w10: P2.1 U7.31
UART1_TX: P2.2 U7.30 | length 296.7
  Top Layer w10: P2.2 135.16,-593.53 U7.30
UART3_RX: U7.22
UART3_TX: U7.21
VBAT: S1.1 U3.3 | length 166.9
  Top Layer w30: U3.3 -307.4,489.4 S1.1
pads on no net: C1.0 C2.0 C3.0 C4.0 C5.0 C6.0 C7.0 C8.0 C9.0 C10.0 C11.0 C12.0 C13.0 C14.0 C15.0 C16.0 C17.0 C18.0 C19.0 C20.0 D1.0 D2.0 J3. J3.2 J3.3 J3.4 L1.0 R1.0 R2.0 R3.0 R4.0 R5.0 R6.0 R7.0 R8.0 R9.0 R10.0 R11.0 R12.0 R13.0 R14.0 R15.0 R16.0 R17.0 R18.0 R19.0 R20.0 R21.0 R22.0 R23.0 S1. U1.3 U1.5 U1.6 U1.7 U1.14 U2.6 U3.0 U4.0 U5.0 U5.4 U6.2 U6.3 U6.4 U6.5 U6.14 U6.15 U6.16 U6.17 U6.19 U6.21 U6.22 U6.25 U7.1 U7.2 U7.3 U7.4 U7.25 U7.45 U7.46
copper on no net:
  other v1: 978,839
  other v3: -287.65,-354.65 -244.35,-354.65 -244.35,-311.35
  other v4: -287.65,-311.35

## Polygon pours and split planes (outlines as drawn)
GND on Top Layer "Top Layer-No Net" (solid, remove dead copper, pour order 8): -2131,2045 2217,2045 2217,-2116 2206,-2127 2184,-2149 -2120,-2149 -2120,2012 -2142,2034
GND on Bottom Layer "Top Layer-No Net" (solid, remove dead copper, pour order 10): -2098,2078 -2087,2089 2326,2089 2326,-2160 2315,-2171 2304,-2182 -2109,-2182 -2109,2089 -2120,2100

## Keep-outs
Keep-Out Layer:
  lines w10: -1881.32,1628.17 cw(c-3500.97,-756.29) -905.35,497.38 cw(c-1920,0) -905.35,-497.38 ; -1880.21,1629.81 cw(c-1750,1750) -1619.79,1870.19 ; -1864.46,-1614.73 ccw(c-1750,-1750) -1619.79,-1870.19 ; -1864.41,-1614.81 ccw(c-3500,758.75) -904.38,-494.92 ; -1620.33,-1869.83 cw(c756.29,-3500.97) -497.38,-905.35 cw(c0,-1920) 497.38,-905.35 ; -1619.1,1870.66 ccw(c758.75,3500) -494.92,904.38 ; -497.38,905.35 ccw(c0,1920) 497.38,905.35 ccw(c-756.29,3500.97) 1624.45,1875.85 ; 494.92,-904.38 cw(c-758.75,-3500) 1598.21,-1840.59 ; 904.38,494.92 cw(c3500,-758.75) 1870.86,1619.24 ; 905.35,497.38 ccw(c1920,0) 905.35,-497.38 ccw(c3500.97,756.29) 1829.03,-1591.81 ; 1598.05,-1841.17 ccw(c1750,-1750) 1829.25,-1591.51 ; 1623.51,1876.49 cw(c1750,1750) 1871.33,1618.55

## Silkscreen, mask and mechanical layers (free items; w line width, h text height)
Top Overlay:
  lines w10: -1590,-1490 -1571.01,-1497.48 ; -1590,1490 -1571.01,1497.48 ; -1580,-1520 -1571.01,-1497.48 ; -1580,1520 -1571.01,1497.48 ; -1497.48,-1571.01 cw(c-1550,-1550) -1571.01,-1497.48 ; -1497.48,1571.01 ccw(c-1550,1550) -1571.01,1497.48 ; -800,-700 -800,-800 -700,-800 ; -800,700 -800,800 -700,800 ; 700,-800 800,-800 800,-700 ; 700,800 800,800 800,700 ; 1497.48,-1571.01 ccw(c1550,-1550) 1571.01,-1497.48 ; 1497.48,1571.01 cw(c1550,1550) 1571.01,1497.48 ; 1580,-1520 1571.01,-1497.48 ; 1580,1520 1571.01,1497.48 ; 1590,-1490 1571.01,-1497.48 ; 1590,1490 1571.01,1497.48 ; 593.51,-1.43 ccw(c593.51,119.28) 678.86,33.93 693.51,48.57 674.55,124.39 787,0 675.54,-123.29 693.51,-51.43 678.86,-36.78 ccw(c593.51,-122.14) 593.51,-1.43 ; 593.51,-1.43 543.51,-1.43 593.51,-1.43
  lines w39.37: -1460,-1290 -1290,-1460 ; -1460,1300 -1290,1470 ; -1420,-1250 -1250,-1420 ; -1420,1260 -1250,1430
  text "M4" at 1520,1550 h27.56 r315
  text "M1" at -1550,1530 h27.56 r45
  text "+" at 1246,1301 h27.56 r45
  text "+" at -1314,1216 h27.56 r45
  text "+" at 1315,-1256 h27.56 r45
  text "+" at -1226,-1324 h27.56 r45
  text "M3" at 1550,-1520 h27.56 r225
  text "M2" at -1520,-1550 h27.56 r135
Bottom Overlay:
  lines w10: -782,-791 -782,793 788,793 788,-791 -782,-791 ; -716,-707 -716,709 722,709 722,-707 -716,-707

## Dimensions
-1750,-1750 to 1750,-1750 on Top Overlay